# Altium PCB project_2_V00.02.PcbDoc
Units mil, origin at the board's own origin, x right, y up, seen from the top; angles counter-clockwise.
Board outline 6000 x 4000 mil, 2 copper layers (Top Layer, Bottom Layer); 3 components, 37 nets, 82 pads, 0 vias.
Unrouted connection lines stored in the file: 3.
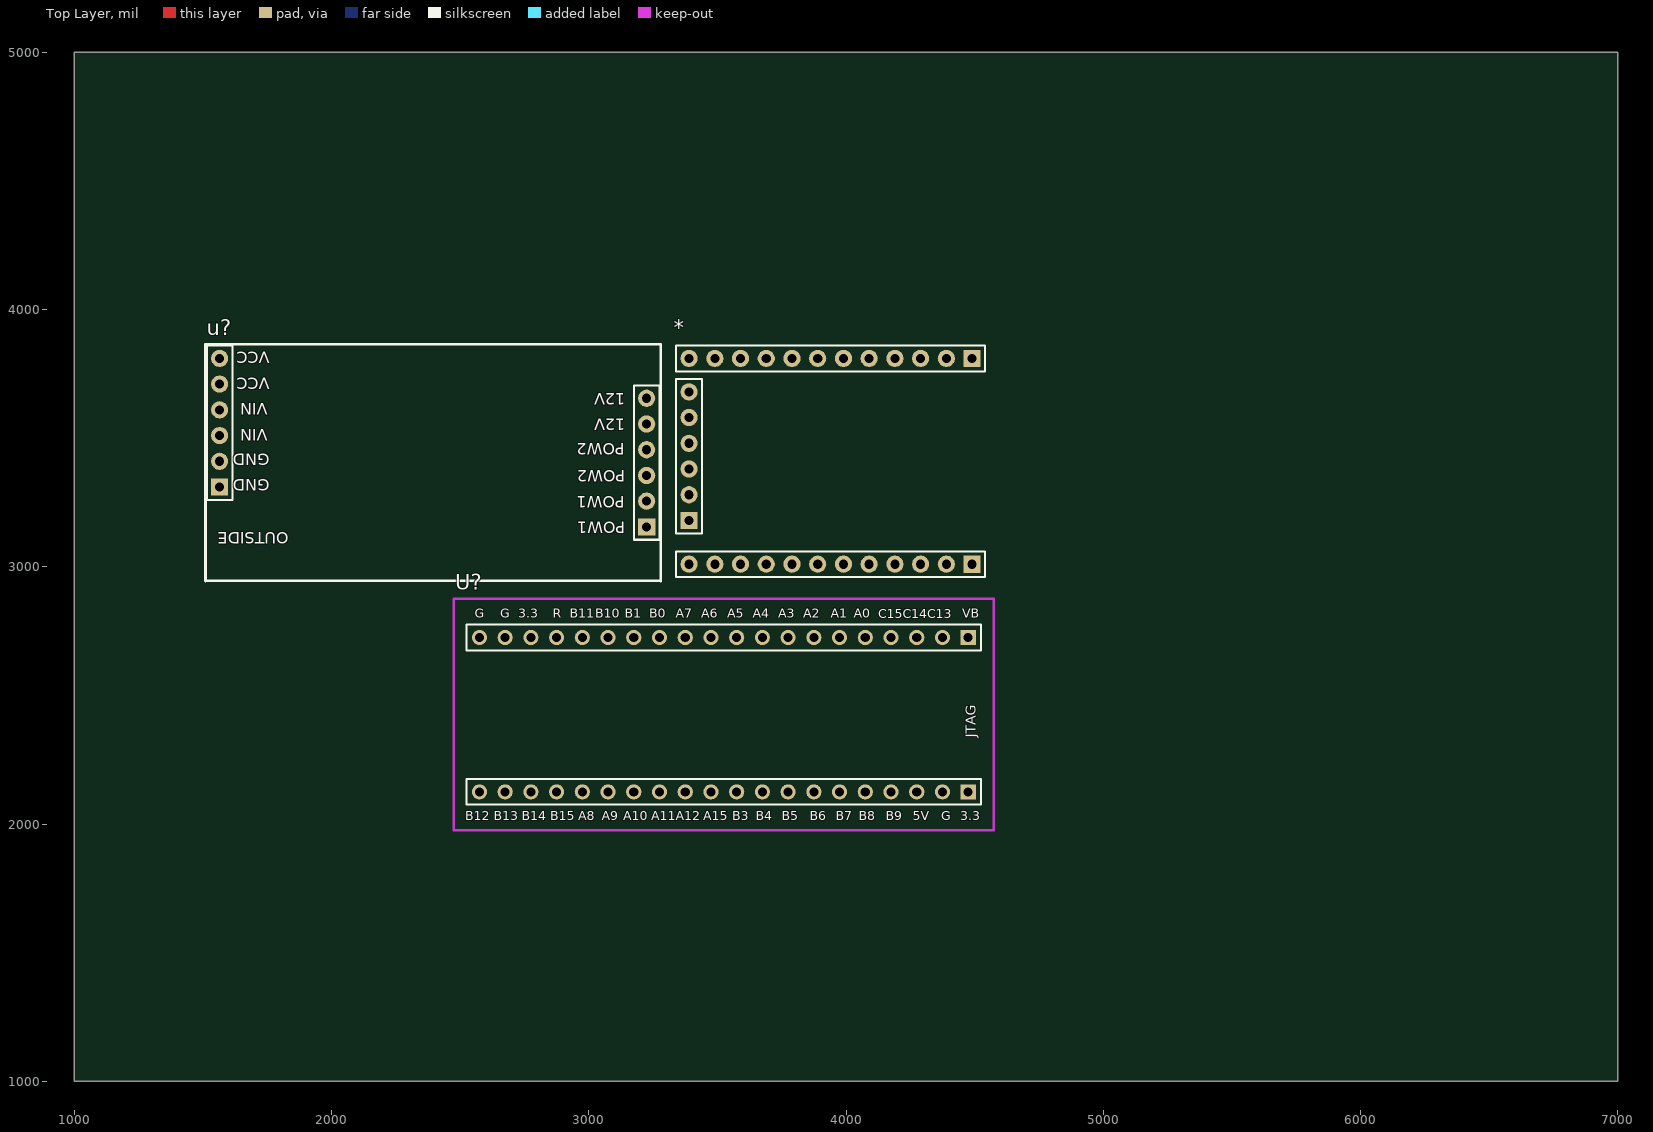
[diagram p0: Top Layer view]
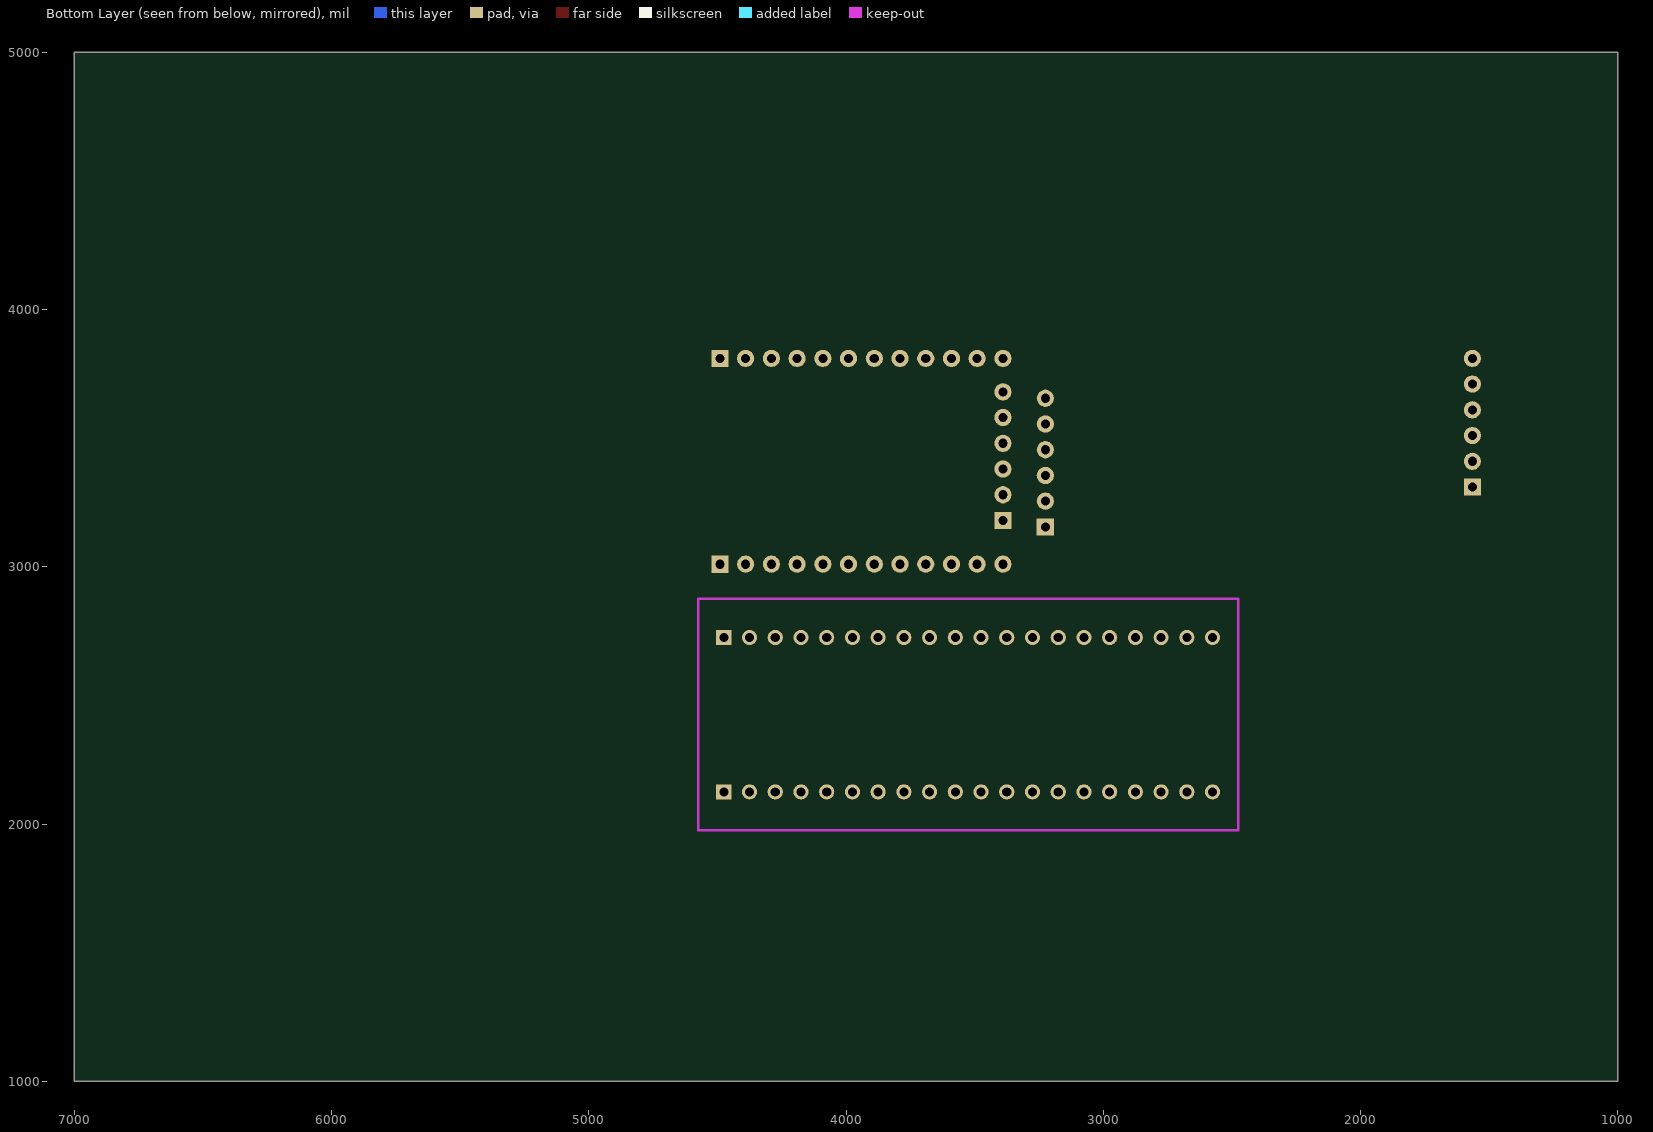
[diagram p1: Bottom Layer view, seen from below]

## Layer stack, top to bottom
Top Solder: solder mask 0.4, Solder Resist, Dk 3.5
Top Layer: signal copper 1.4
Dielectric 1: dielectric 12.6, FR-4, Dk 4.8
Bottom Layer: signal copper 1.4
Bottom Solder: solder mask 0.4, Solder Resist, Dk 3.5

## Board outline
1000,1000 7000,1000 7000,5000 1000,5000

## Design rules (kind name [scope] priority, off if disabled: settings)
Clearance [All] p1: gap=10 ignorepadtopadclearanceinfootprint=FALSE
PolygonConnect [All] p1: connectstyle=Relief reliefconductorwidth=10 reliefentries=4 polygonreliefangle="90 Angle" airgapwidth=10
RoutingVias [All] p1: holewidth=28 width=50 viastyle="Through Hole" minholewidth=28 minwidth=50 maxholewidth=28 maxwidth=50
SolderMaskExpansion [All] p1: expansion=4 istentingtop=FALSE
SupplyNets "Schematic Supply Nets_2" [InNet('3V3')] p1: voltage=0.000
SupplyNets "Schematic Supply Nets_1" [InNet('5V')] p2: voltage=0.000
SupplyNets "Schematic Supply Nets" [InNet('GND')] p3: voltage=0.000
Width [All] p1: maxlimit=10 minlimit=10 preferedwidth=10
30 further rules are at their usual default settings.

## Components (designator, comment, footprint, x,y, rotation, side; value= is the part's Value field where it differs from the comment)
* "mod_tb6612_3" mod_tb6612_3 3785,3400 r90 top
u? "pow_hw_2" pow_hw_2 2450,3385 r180 top
U? "f1_hw_2_gw" F1_HW_2_GW 3535,2435 r0 top

## Footprints (in the part's own frame and the unit in brackets; to place one, negate y for a bottom-side part, rotate by r counter-clockwise, add the part's x,y. Pads: shape width x height; smd on the part's side, far side on the other; paste and mask are expansions set on the pad)
F1_HW_2_GW [mm]
  rect 1.5x1.5 hole 0.9: 1(23.876,7.366) 21(23.876,-7.874)
  round 1.5 hole 0.9: 2(21.336,7.366) 3(18.796,7.366) 4(16.256,7.366) 5(13.716,7.366) 6(11.176,7.366) 7(8.636,7.366) 8(6.096,7.366) 9(3.556,7.366) 10(1.016,7.366) 11(-1.524,7.366) 12(-4.064,7.366) 13(-6.604,7.366) 14(-9.144,7.366) 15(-11.684,7.366) 16(-14.224,7.366) 17(-16.764,7.366) 18(-19.304,7.366) 19(-21.844,7.366) 20(-24.384,7.366) 22(21.336,-7.874) 23(18.796,-7.874) 24(16.256,-7.874) 25(13.716,-7.874) 26(11.176,-7.874) 27(8.636,-7.874) 28(6.096,-7.874) 29(3.556,-7.874) 30(1.016,-7.874) 31(-1.524,-7.874) 32(-4.064,-7.874) 33(-6.604,-7.874) 34(-9.144,-7.874) 35(-11.684,-7.874) 36(-14.224,-7.874) 37(-16.764,-7.874) 38(-19.304,-7.874) 39(-21.844,-7.874) 40(-24.384,-7.874)
  Keep-Out Layer lines w0.254: -26.924,-11.684 -26.924,-10.414 -26.924,-0.254 -26.924,11.176 ; -26.899,-11.684 26.391,-11.684 ; -26.899,11.176 26.391,11.176 ; 26.416,-11.684 26.416,-10.414 26.416,-0.254 26.416,11.176
  silkscreen extent -25.65,-9.14 25.15,8.64, body extent -26.92,-11.56 26.42,11.18, height 0.25
mod_tb6612_3 [mm]
  rect 1.7x1.7 hole 0.9: 1(-9.906,-17.907) 1(-5.588,10.033) 1(10.414,-17.907)
  round 1.7 hole 0.9: 2(-9.906,-15.367) 2(-3.048,10.033) 2(10.414,-15.367) 3(-9.906,-12.827) 3(-0.508,10.033) 3(10.414,-12.827) 4(-9.906,-10.287) 4(2.032,10.033) 4(10.414,-10.287) 5(-9.906,-7.747) 5(4.572,10.033) 5(10.414,-7.747) 6(-9.906,-5.207) 6(7.112,10.033) 6(10.414,-5.207) 7(-9.906,-2.667) 7(10.414,-2.667) 8(-9.906,-0.127) 8(10.414,-0.127) 9(-9.906,2.413) 9(10.414,2.413) 10(-9.906,4.953) 10(10.414,4.953) 11(-9.906,7.493) 11(10.414,7.493) 12(-9.906,10.033) 12(10.414,10.033)
  silkscreen extent -11.18,-19.18 11.68,11.3, body extent -11.43,-20.32 12.07,11.68, height 8.5
pow_hw_2 [mm] "pow_hw_2"
  round 1.7 hole 0.9: 0(22.479,-10.795) 0(22.479,-8.255) 1(22.479,-5.715) 1(22.479,-3.175) 2(22.479,-0.635) 3(-19.685,-6.858) 3(-19.685,-4.318) 4(-19.685,-1.778) 4(-19.685,0.762) 5(-19.685,3.302)
  rect 1.7x1.7 hole 0.9: 2(22.479,1.905) 5(-19.685,5.842)
  silkscreen extent -21.08,-12.19 23.88,11.18, body extent -21.08,-12.19 23.88,11.18, height 8.5

## Part data
u?: "两路升降压电源模块 / 6p排母*2"

## Nets (pads, with @x,y where several pads share a name; then routed paths per layer and width w, separated by ;. In a path a pad name is that pad's centre, name@x,y a point inside that pad or via, vN(x,y) a via of type N, cw(c..) or ccw(c..) an arc to the next point about the centre after c; other vN are vias at no path point)
3V3: U?.18 U?.21
5V: U?.23
GND: U?.19 U?.20 U?.22
NRST: U?.17
PA0: U?.5
PA1: U?.6
PA2: U?.7
PA3: U?.8
PA4: U?.9
PA5: U?.10
PA6: U?.11
PA7: U?.12
PA8: U?.36
PA9: U?.35
PA10: U?.34
PA11: U?.33
PA12: U?.32
PA15: U?.31
PB0: U?.13
PB1: U?.14
PB3: U?.30
PB4: U?.29
PB5: U?.28
PB6: U?.27
PB7: U?.26
PB8: U?.25
PB9: U?.24
PB10: U?.15
PB11: U?.16
PB12: U?.40
PB13: U?.39
PB14: U?.38
PB15: U?.37
PC13: U?.2
PC14: U?.3
PC15: U?.4
VBAT: U?.1
pads on no net: *.1 *.2 *.3 *.4 *.5 *.6 *.7 *.8 *.9 *.10 *.11 *.12 u?.0 u?.1 u?.2 u?.3 u?.4 u?.5

## Text inside footprints (layer, text, board x,y; h text height)
u?: Top Overlay "POW2" at 3140,3480 h45 r180; Top Overlay "POW1" at 3140,3275 h45 r180; Top Overlay "12V" at 3142.38,3675 h45 r180; Top Overlay "12V" at 3142.38,3575 h45 r180; Top Overlay "POW2" at 3142.38,3375 h45 r180; Top Overlay "POW1" at 3142.38,3175 h45 r180; Top Overlay "GND" at 1760,3440 h45 r180; Top Overlay "GND" at 1760,3340 h45 r180; Top Overlay "VIN" at 1752.5,3635 h45 r180; Top Overlay "VIN" at 1752.5,3535 h45 r180; Top Overlay "VCC" at 1760,3835 h45 r180; Top Overlay "VCC" at 1760,3735 h45 r180; Top Overlay "OUTSIDE" at 1834.16,3133.77 h45 r180
U?: Top Overlay "JTAG" at 4505,2335 h39.37 r90; Top Overlay "R" at 2860,2802 h35.43; Top Overlay "B11" at 2926,2802 h35.43; Top Overlay "B10" at 3025,2802 h35.43; Top Overlay "B1" at 3140,2802 h35.43; Top Overlay "B0" at 3235,2802 h35.43; Top Overlay "A0" at 4030,2802 h35.43; Top Overlay "A1" at 3941,2802 h35.43; Top Overlay "A2" at 3834.29,2802 h35.43; Top Overlay "A3" at 3736.43,2802 h35.43; Top Overlay "A4" at 3637,2802 h35.43; Top Overlay "A5" at 3539,2802 h35.43; Top Overlay "A6" at 3438,2802 h35.43; Top Overlay "A7" at 3338,2802 h35.43; Top Overlay "VB" at 4451,2802 h35.43; Top Overlay "3.3" at 2725,2802 h35.43; Top Overlay "G" at 2656,2802 h35.43; Top Overlay "G" at 2556,2802 h35.43; Top Overlay "B12" at 2520,2015 h35.43; Top Overlay "B13" at 2630,2015 h35.43; Top Overlay "B14" at 2740,2015 h35.43; Top Overlay "B15" at 2850,2015 h35.43; Top Overlay "A8" at 2960,2015 h35.43; Top Overlay "A9" at 3050,2015 h35.43; Top Overlay "A10" at 3135,2015 h35.43; Top Overlay "A11" at 3243,2015 h35.43; Top Overlay "A12" at 3338,2015 h35.43; Top Overlay "A15" at 3446,2015 h35.43; Top Overlay "B3" at 3558,2015 h35.43; Top Overlay "B4" at 3650,2015 h35.43; Top Overlay "B5" at 3750,2015 h35.43; Top Overlay "B6" at 3860,2015 h35.43; Top Overlay "B7" at 3960,2015 h35.43; Top Overlay "B8" at 4050,2015 h35.43; Top Overlay "B9" at 4155,2015 h35.43; Top Overlay "5V" at 4260,2015 h35.43; Top Overlay "G" at 4370,2015 h35.43; Top Overlay "3.3" at 4445,2015 h35.43; Top Overlay "C15C14C13" at 4125,2800 h35.43